# Altium PCB PCBH.PcbDoc
Units mil, origin at the board's own origin, x right, y up, seen from the top; angles counter-clockwise.
Board outline 6000 x 4000 mil, 2 copper layers (Top Layer, Bottom Layer); 8 components, 13 nets, 82 pads, 0 vias.
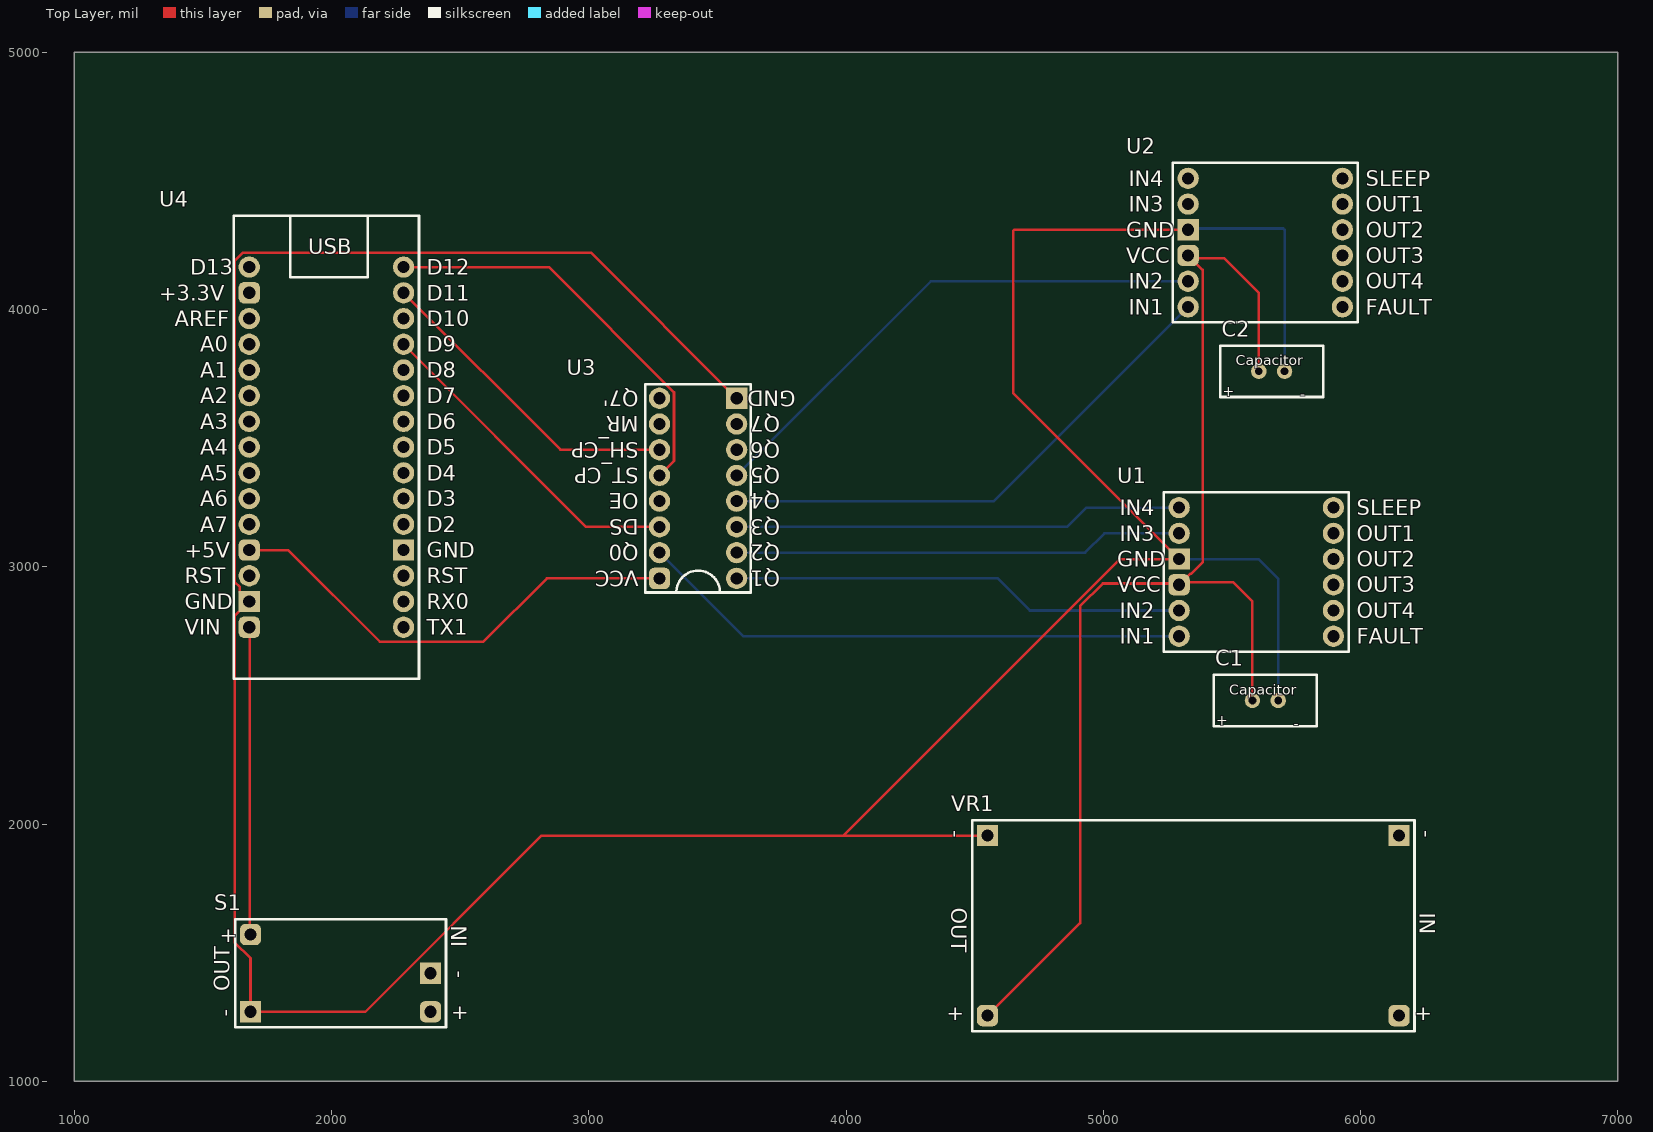
[diagram p0: Top Layer view]
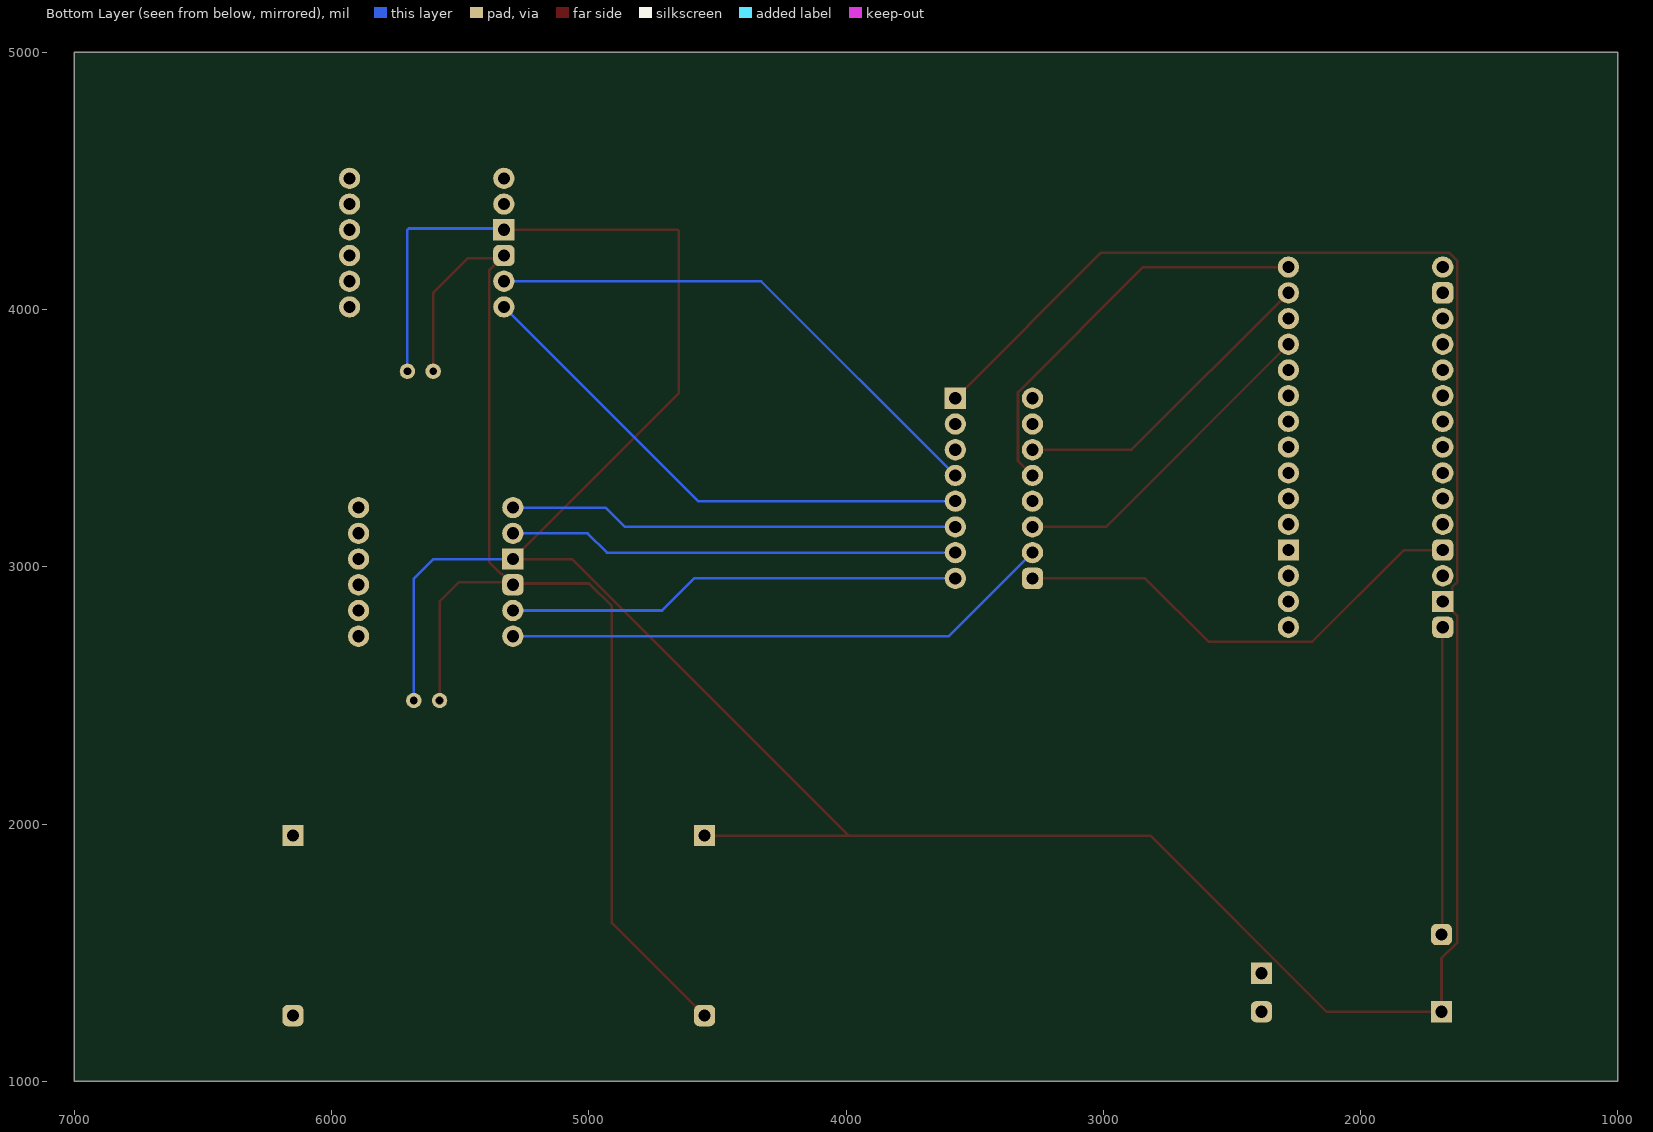
[diagram p1: Bottom Layer view, seen from below]

## Layer stack, top to bottom
Top Solder: solder mask 0.4, Solder Resist, Dk 3.5
Top Layer: signal copper 1.4
Dielectric 1: dielectric 12.6, FR-4, Dk 4.8
Bottom Layer: signal copper 1.4
Bottom Solder: solder mask 0.4, Solder Resist, Dk 3.5

## Board outline
1000,1000 7000,1000 7000,5000 1000,5000

## Design rules (kind name [scope] priority, off if disabled: settings)
Clearance [All] p1: gap=10 ignorepadtopadclearanceinfootprint=FALSE
PolygonConnect [All] p1: connectstyle=Relief reliefconductorwidth=10 reliefentries=4 polygonreliefangle="90 Angle" airgapwidth=10
RoutingVias [All] p1: holewidth=28 width=50 viastyle="Through Hole" minholewidth=28 minwidth=50 maxholewidth=28 maxwidth=50
SolderMaskExpansion [All] p1: expansion=4 istentingtop=FALSE
Width [All] p1: maxlimit=10 minlimit=10 preferedwidth=10
30 further rules are at their usual default settings.

## Components (designator, comment, footprint, x,y, rotation, side; value= is the part's Value field where it differs from the comment)
C1 "Capacitor" Capacitor 5630,2480 r0 top
C2 "Capacitor" Capacitor 5655,3760 r0 top
S1 "SX1308" "DC-DC Step-Up Footprint" 1585,1170 r0 top
U1 "DRV8833" PCB_DRV8833 5195,2630 r0 top
U2 "DRV8833" PCB_DRV8833 5230,3910 r0 top
U3 "74HC595" PCB_74HC595_Footprint 3675,3755 r180 top
U4 "ATMega328p" PCB_ATMega328p 1580,2665 r0 top
VR1 "LM2596" "DC-DC Step-Down Footprint" 6250,2055 r180 top

## Footprints (in the part's own frame and the unit in brackets; to place one, negate y for a bottom-side part, rotate by r counter-clockwise, add the part's x,y. Pads: shape width x height; smd on the part's side, far side on the other; paste and mask are expansions set on the pad)
Capacitor [mil]
  round 60 hole 30: 0(-50,0) 1(50,0)
  silkscreen extent -200,-100 200,100
"DC-DC Step-Down Footprint" [mm]
  rrect50% 2.1x2.1 hole 1.2: 0(2.54,20.32) 2(43.18,20.32)
  rect 2.1x2.1 hole 1.2: 1(2.54,2.54) 3(43.18,2.54)
  silkscreen extent 1.02,1.02 44.7,21.84
"DC-DC Step-Up Footprint" [mm]
  rrect50% 2.1x2.1 hole 1.2: 0(2.54,10.16) 3(20.32,2.54)
  rect 2.1x2.1 hole 1.2: 1(2.54,2.54) 2(20.32,6.35)
  silkscreen extent 1.02,1.02 21.84,11.68
PCB_74HC595_Footprint [mm]
  rect 2.1x2.1 hole 1.2: 0(2.54,2.54)
  round 2.1 hole 1.2: 1(2.54,5.08) 2(2.54,7.62) 3(2.54,10.16) 4(2.54,12.7) 5(2.54,15.24) 6(2.54,17.78) 7(2.54,20.32) 9(10.16,17.78) 10(10.16,15.24) 11(10.16,12.7) 12(10.16,10.16) 13(10.16,7.62) 14(10.16,5.08) 15(10.16,2.54)
  rrect50% 2.1x2.1 hole 1.2: 8(10.16,20.32)
  silkscreen extent 1.14,1.14 11.56,21.72
PCB_ATMega328p [mm] "Arduino Nano"
  rrect50% 2.1x2.1 hole 1.2: 0(2.54,2.54) 3(2.54,10.16) 13(2.54,35.56)
  rect 2.1x2.1 hole 1.2: 1(2.54,5.08) 26(17.78,10.16)
  round 2.1 hole 1.2: 2(2.54,7.62) 4(2.54,12.7) 5(2.54,15.24) 6(2.54,17.78) 7(2.54,20.32) 8(2.54,22.86) 9(2.54,25.4) 10(2.54,27.94) 11(2.54,30.48) 12(2.54,33.02) 14(2.54,38.1) 15(17.78,38.1) 16(17.78,35.56) 17(17.78,33.02) 18(17.78,30.48) 19(17.78,27.94) 20(17.78,25.4) 21(17.78,22.86) 22(17.78,20.32) 23(17.78,17.78) 24(17.78,15.24) 25(17.78,12.7) 27(17.78,7.62) 28(17.78,5.08) 29(17.78,2.54)
  silkscreen extent 1.02,-2.54 19.3,43.18
PCB_DRV8833 [mm]
  round 2.1 hole 1.2: 0(2.54,2.54) 1(2.54,5.08) 4(2.54,12.7) 5(2.54,15.24) 6(17.78,15.24) 7(17.78,12.7) 8(17.78,10.16) 9(17.78,7.62) 10(17.78,5.08) 11(17.78,2.54)
  rrect50% 2.1x2.1 hole 1.2: 2(2.54,7.62)
  rect 2.1x2.1 hole 1.2: 3(2.54,10.16)
  silkscreen extent 1.02,1.02 19.3,16.76

## Part data
S1: "Модуль mini DC-DC Step-Up Converter 2.5...10V to 5V / 8V / 9V / 12V - это миниатюрный повышающий преобразователь постоянного тока на микросхеме импульсного преобразователя SX1308.  /  /  Выходное напряжение на преобразователе имеет четыре фиксированных настройки - 5В, 8В, 9В или 12В, одно из этих напряжений выбирается запайкой соответствующей комбинации перемычек A и B (по табличке на обратной стороне платы). /  /  Максимальный выходной ток зависит от установленного выходного напряжения, при 5В он равен 1А, при 8В - 0.5А, 9В - 0,45А, 12В - 0.3А. Частота преобразования - 1.2 МГц. /  /  На плате (со стороны Vout) светодиод - индикатор питания. По умолчанию он выключен. Для включения этого светодиода также нужно запаять соседнюю перемычку."
U1 U4: library part "Arduino Nano", "DCCduino Nano CH340 - аналог Arduino Nano v3.0 TYPE C"
U2: library part "Motor Driver", "Драйвер крокового/колекторних двигунів DRV8833"
U3: library part SCS-16, "SN74HC595N - вихідний зсувний регістр 74HC595"
VR1: library part "DC-DC Step-Down", "DC-DC конвертер знижуючий 4.5...40В на 1.5...35В на LM2596"

## Nets (pads, with @x,y where several pads share a name; then routed paths per layer and width w, separated by ;. In a path a pad name is that pad's centre, name@x,y a point inside that pad or via, vN(x,y) a via of type N, cw(c..) or ccw(c..) an arc to the next point about the centre after c; other vN are vias at no path point)
NetC1_0: C1.0 C2.0 U1.2 U2.2 VR1.2 | length 4838.5
  Top Layer w10: VR1.2 4910,1615 4910,2846.72 4998.28,2935 5290,2935 U1.2 ; U2.2 U2.2@5340,4200 ; C1.0 5580,2864.14 5504.14,2940 5305,2940 U1.2 ; C2.0 5605,4065 5470,4200 U2.2@5340,4200 ; U1.2 5338.66,2973.66 5342.55,2973.66 5386.34,3017.45 5386.34,4153.66 U2.2@5340,4200
NetC1_1: C1.1 C2.1 S1.1 U1.3 U2.3 U3.0 U4.1 VR1.3 | length 14133.2
  Top Layer w10: U3.0 3008.66,4221.34 1656.66,4221.34 1623.66,4188.34 1623.66,2941.66 1643.66,2921.66 1643.66,2901.34 U4.1 1623.66,2808.66 1623.66,1539.56 1685,1478.22 S1.1 2131.11,1270 2816.11,1955 3990,1955 ; VR1.3 3990,1955 ; U2.3 4975.19,4310 4974.33,4310.86 4655.86,4310.86 4650,4305 4650,3675 U1.3 5065,3030 3990,1955
  Bottom Layer w10: U1.3 5604.14,3030 5680,2954.14 C1.1 ; U2.3 5335,4315 5699.14,4315 5705,4309.14 C2.1
NetS1_0: S1.0 U4.0 | length 1197.1
  Top Layer w10: U4.0 1682.5,2762.5 1682.5,1572.5 S1.0
NetU1_0: U1.0 U3.9 | length 2154.6
  Bottom Layer w10: U3.9 3600,2730 U1.0
NetU1_1: U1.1 U3.7 | length 1771.8
  Bottom Layer w10: U3.7 4590,2955 4715,2830 U1.1
NetU1_4: U1.4 U3.6 | length 1751.1
  Bottom Layer w10: U3.6 4930,3055 5005,3130 U1.4
NetU1_5: U1.5 U3.5 | length 1751.1
  Bottom Layer w10: U3.5 4860,3155 4935,3230 U1.5
NetU2_0: U2.0 U3.4 | length 2067.7
  Bottom Layer w10: U3.4 4575,3255 U2.0
NetU2_1: U2.1 U3.3 | length 2067.7
  Bottom Layer w10: U3.3 4330,4110 U2.1
NetU3_8: U3.8 U4.3 | length 1844.6
  Top Layer w10: U4.3 1831.07,3065 2187.41,2708.66 2590.46,2708.66 2836.8,2955 U3.8
NetU3_10: U3.10 U4.18 | length 1289.1
  Top Layer w10: U4.18 2990,3155 U3.10
NetU3_12: U3.12 U4.15 | length 1599.6
  Top Layer w10: U4.15 2844.67,4165 3331.34,3678.34 3331.34,3411.34 U3.12
NetU3_13: U3.13 U4.16 | length 1247.7
  Top Layer w10: U4.16 2890,3455 U3.13
pads on no net: S1.2 S1.3 U1.6 U1.7 U1.8 U1.9 U1.10 U1.11 U2.4 U2.5 U2.6 U2.7 U2.8 U2.9 U2.10 U2.11 U3.1 U3.2 U3.11 U3.14 U3.15 U4.2 U4.4 U4.5 U4.6 U4.7 U4.8 U4.9 U4.10 U4.11 U4.12 U4.13 U4.14 U4.17 U4.19 U4.20 U4.21 U4.22 U4.23 U4.24 U4.25 U4.26 U4.27 U4.28 U4.29 VR1.0 VR1.1

## Text inside footprints (layer, text, board x,y; h text height)
C1: Top Overlay "+" at 5440,2383.44 h39.37; Top Overlay "-" at 5740,2370.32 h39.37
C2: Top Overlay "+" at 5465,3663.44 h39.37; Top Overlay "-" at 5765,3650.32 h39.37
S1: Top Overlay "OUT" at 1605,1350 h60 r90; Top Overlay "+" at 1565,1540 h60; Top Overlay "-" at 1614.99,1250 h60 r90; Top Overlay "IN" at 2525,1520 h60 r90; Top Overlay "-" at 2514.99,1400 h60 r90; Top Overlay "+" at 2465,1240 h60
U1: Top Overlay "FAULT" at 5985,2700 h60; Top Overlay "OUT4" at 5985,2800 h60; Top Overlay "OUT3" at 5985,2900 h60; Top Overlay "OUT2" at 5985,3000 h60; Top Overlay "OUT1" at 5985,3100 h60; Top Overlay "SLEEP" at 5985,3200 h60; Top Overlay "IN4" at 5065,3200 h60; Top Overlay "IN3" at 5065,3100 h60; Top Overlay "GND" at 5055,3000 h60; Top Overlay "VCC" at 5055,2900 h60; Top Overlay "IN2" at 5065,2800 h60; Top Overlay "IN1" at 5065,2700 h60
U2: Top Overlay "IN1" at 5100,3980 h60; Top Overlay "IN2" at 5100,4080 h60; Top Overlay "VCC" at 5090,4180 h60; Top Overlay "GND" at 5090,4280 h60; Top Overlay "IN3" at 5100,4380 h60; Top Overlay "IN4" at 5100,4480 h60; Top Overlay "SLEEP" at 6020,4480 h60; Top Overlay "OUT1" at 6020,4380 h60; Top Overlay "OUT2" at 6020,4280 h60; Top Overlay "OUT3" at 6020,4180 h60; Top Overlay "OUT4" at 6020,4080 h60; Top Overlay "FAULT" at 6020,3980 h60
U3: Top Overlay "Q7'" at 3195,3685 h60 r180; Top Overlay "MR" at 3195,3585 h60 r180; Top Overlay "SH_CP" at 3195,3485 h60 r180; Top Overlay "ST_CP" at 3195,3385 h60 r180; Top Overlay "OE" at 3195,3285 h60 r180; Top Overlay "DS" at 3195,3185 h60 r180; Top Overlay "Q0" at 3195,3085 h60 r180; Top Overlay "VCC" at 3195,2985 h60 r180; Top Overlay "GND" at 3805,3685 h60 r180; Top Overlay "Q7" at 3745,3585 h60 r180; Top Overlay "Q6" at 3745,3485 h60 r180; Top Overlay "Q5" at 3745,3385 h60 r180; Top Overlay "Q4" at 3745,3285 h60 r180; Top Overlay "Q3" at 3745,3185 h60 r180; Top Overlay "Q2" at 3745,3085 h60 r180; Top Overlay "Q1" at 3745,2985 h60 r180
U4: Top Overlay "D13" at 1450,4135 h60; Top Overlay "+3.3V" at 1330,4035 h60; Top Overlay "AREF" at 1390,3935 h60; Top Overlay "A0" at 1490,3835 h60; Top Overlay "A1" at 1490,3735 h60; Top Overlay "A2" at 1490,3635 h60; Top Overlay "A3" at 1490,3535 h60; Top Overlay "A4" at 1490,3435 h60; Top Overlay "A5" at 1490,3335 h60; Top Overlay "A6" at 1490,3235 h60; Top Overlay "A7" at 1490,3135 h60; Top Overlay "+5V" at 1430,3035 h60; Top Overlay "RST" at 1430,2935 h60; Top Overlay "GND" at 1430,2835 h60; Top Overlay "VIN" at 1430,2735 h60; Top Overlay "D12" at 2370,4135 h60; Top Overlay "D11" at 2370,4035 h60; Top Overlay "D10" at 2370,3935 h60; Top Overlay "D9" at 2370,3835 h60; Top Overlay "D8" at 2370,3735 h60; Top Overlay "D7" at 2370,3635 h60; Top Overlay "D6" at 2370,3535 h60; Top Overlay "D5" at 2370,3435 h60; Top Overlay "D4" at 2370,3335 h60; Top Overlay "D3" at 2370,3235 h60; Top Overlay "D2" at 2370,3135 h60; Top Overlay "GND" at 2370,3035 h60; Top Overlay "RST" at 2370,2935 h60; Top Overlay "RX0" at 2370,2835 h60; Top Overlay "TX1" at 2370,2735 h60; Top Overlay "USB" at 1910,4215 h60
VR1: Top Overlay "+" at 6280,1285 h60 r180; Top Overlay "-" at 6230.01,1975 h60 r270; Top Overlay "-" at 4400.01,1975 h60 r270; Top Overlay "+" at 4460,1285 h60 r180; Top Overlay "IN" at 6230,1655 h60 r270; Top Overlay "OUT" at 4410,1675 h60 r270